# Altium PCB Strawberry Pi.PcbDoc
Units mm, origin at the board's own origin, x right, y up, seen from the top; angles counter-clockwise.
Board outline 85 x 55 mm, 2 copper layers (Top Layer, Bottom Layer); 91 components, 93 nets, 595 pads, 64 vias.
Unrouted connection lines stored in the file: 136.
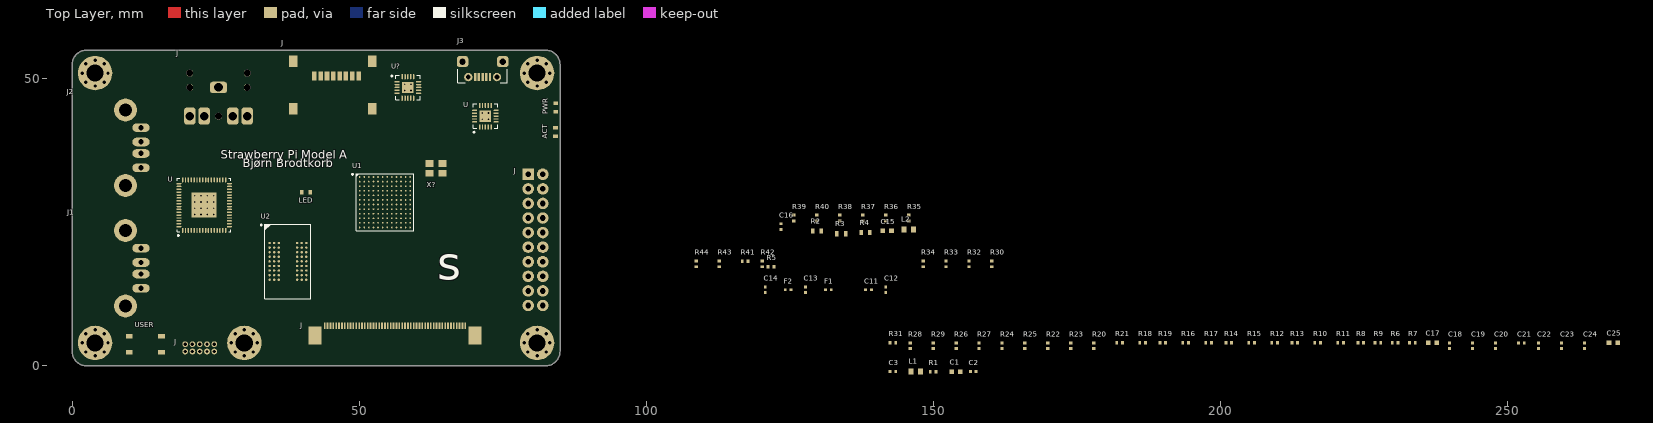
[diagram p0: Top Layer view]
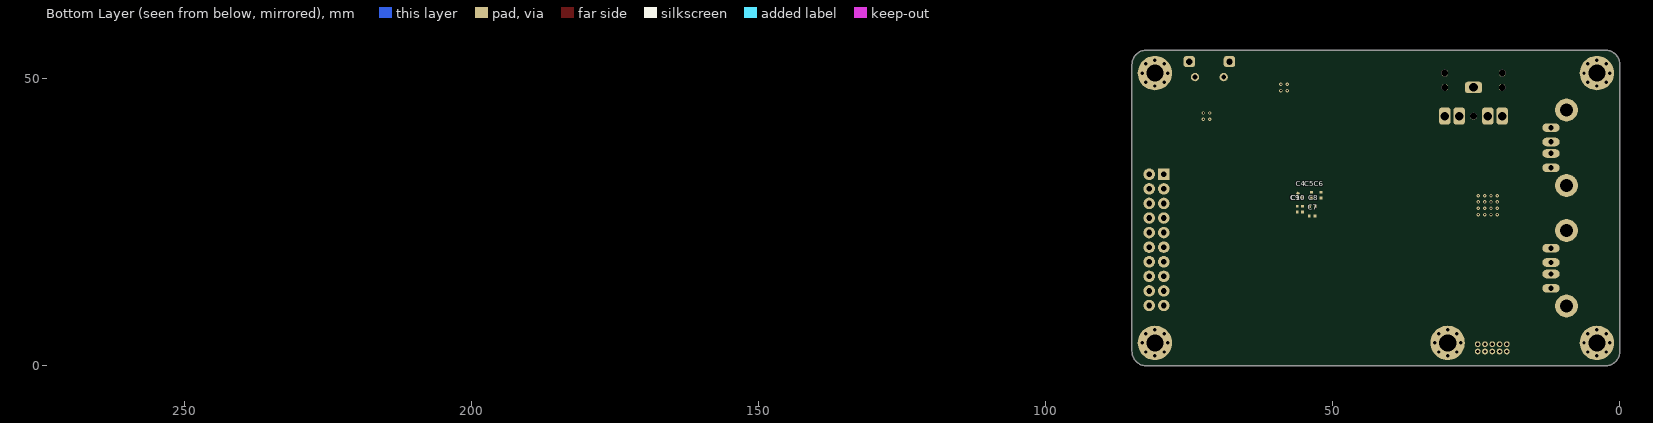
[diagram p1: Bottom Layer view, seen from below]

## Layer stack, top to bottom
Top Solder: solder mask 0.0102, Solder Resist, Dk 3.5
Top Layer: signal copper 0.0356
Dielectric 1: dielectric 0.32, FR-4, Dk 4.8
Bottom Layer: signal copper 0.0356
Bottom Solder: solder mask 0.0102, Solder Resist, Dk 3.5

## Board outline
85,2.54 cw(c82.46,2.54) 82.46,0 2.54,0 cw(c2.54,2.54) 0,2.54 0,52.46 cw(c2.54,52.46) 2.54,55 82.46,55 cw(c82.46,52.46) 85,52.46

## Design rules (kind name [scope] priority, off if disabled: settings)
Clearance [All] p1: gap=0.254 ignorepadtopadclearanceinfootprint=FALSE except(0: Arc-Hole Track-Hole SMDPad-Hole THPad-Hole Via-Hole Fill-Hole Poly-Hole Region-Hole Text-Hole)
PolygonConnect [All] p1: connectstyle=Relief reliefconductorwidth=0.254 reliefentries=4 polygonreliefangle="90 Angle" airgapwidth=0.254
RoutingVias [All] p1: holewidth=0.711 width=1.27 viastyle="Through Hole" minholewidth=0.711 minwidth=1.27 maxholewidth=0.711 maxwidth=1.27
SolderMaskExpansion [All] p1: expansion=0.102 istentingtop=FALSE
Width [All] p1: maxlimit=0.254 minlimit=0.254 preferedwidth=0.254
30 further rules are at their usual default settings.

## Classes and differential pairs
differential pair class DIFF90: USB_ROOT
component class "[09] - IO": ACT USER
component class "[04] - CPU IO": X?
component class "[07] - USB": U
component class "[12] - FTDI": U U?
net class DRAM_DATA: DRAM_D0 DRAM_D1 DRAM_D2 DRAM_D3 DRAM_D4 DRAM_D5 DRAM_D6 DRAM_D7 DRAM_D8 DRAM_D9 DRAM_D10 DRAM_D11 DRAM_D12 DRAM_D13 DRAM_D14 DRAM_D15
net class DRAM_ADDR: DRAM_A0 DRAM_A1 DRAM_A2 DRAM_A3 DRAM_A4 DRAM_A5 DRAM_A6 DRAM_A7 DRAM_A8 DRAM_A9 DRAM_A10 DRAM_A11 DRAM_A12
net class USB_ROOT: USB_ROOT_M USB_ROOT_P
component class "[11] - CONNECTORS": J J1 J2 J3
component class "[06] - MEMORY": C17 C18 C19 C20 C21 C22 C23 C24 C25 R6 R7 R8 R9 R10 R11 R12 R13 R14 R15 R16 R17 R18 R19 R20 R21 R22 R23 R24 R25 R26 R27 R28 R29 R30 R31 R32 R33 R34 R35 R36 R37 R38 R39 R40 R41 R42 R43 R44 U2
component class "[05] - CPU CRITICAL SIGNALS": C15 C16 L2 R2 R3 R4 R5
component class "[03] - CPU POWER": C1 C2 C3 C4 C5 C6 C7 C8 C9 C10 C11 C12 C13 C14 F1 F2 L1 R1 U1

## Components (designator, comment, footprint, x,y, rotation, side; value= is the part's Value field where it differs from the comment)
ACT "LED Green" "L0603 GREEN" 84.22,40.74 r90 top (schematic designator D)
C1 "02016D104KAT2A" C0603 154,-1 r0 top value=4.7uF
C2 "04023C103KAT2A" C0402 157,-1 r0 top value=100nF
C3 "04023C103KAT2A" C0402 143,-1 r0 top value=4.7uF
C4 "04023C103KAT2A" C0402 55.74,29.68 r225 bottom value=100nF
C5 "04023C103KAT2A" C0402 53.7,29.75 r270 bottom value=100nF
C6 "04023C103KAT2A" C0402 52.1,29.73 r270 bottom value=100nF
C7 "04023C103KAT2A" C0402 53.62,26.11 r180 bottom value=100nF
C8 "04023C103KAT2A" C0402 53.52,27.75 r180 bottom value=1uF
C9 "04023C103KAT2A" C0402 56.2,27.31 r270 bottom value=100nF
C10 "04023C103KAT2A" C0402 55.3,27.3 r90 bottom value=100nF
C11 "04023C103KAT2A" C0402 138.75,13.25 r0 top value=100nF
C12 "04023C103KAT2A" C0402 141.75,13.25 r90 top value=100nF
C13 "04023C103KAT2A" C0402 127.75,13.25 r90 top value=100nF
C14 "04023C103KAT2A" C0402 120.75,13.25 r90 top value=100nF
C15 "02016D104KAT2A" C0603 142,23.5 r0 top value=4.7uF
C16 "04023C103KAT2A" C0402 123.5,24.25 r90 top value=100nF
C17 "02016D104KAT2A" C0603 236.999,4 r0 top value=4.7uF
C18 "04023C103KAT2A" C0402 239.999,3.5 r90 top value=100nF
C19 "04023C103KAT2A" C0402 243.999,3.5 r90 top value=100nF
C20 "04023C103KAT2A" C0402 247.999,3.5 r90 top value=100nF
C21 "04023C103KAT2A" C0402 252.499,4 r0 top value=100nF
C22 "04023C103KAT2A" C0402 255.499,3.5 r90 top value=100nF
C23 "04023C103KAT2A" C0402 259.499,3.5 r90 top value=100nF
C24 "04023C103KAT2A" C0402 263.499,3.5 r90 top value=100nF
C25 "02016D104KAT2A" C0603 268.499,4 r0 top value=4.7uF
F1 "BLM15AG102SN1D" "Ferrite bead 0402" 131.75,13.25 r0 top value="470R @ 100MHz"
F2 "BLM15AG102SN1D" "Ferrite bead 0402" 124.75,13.25 r0 top value="470R @ 100MHz"
J "123-34-2234_11_1" "HEADER 2X5 MALE 1.27MM" 24.77,2.5 r90 top
J "123-34-2234_16" "HEADER 2X10 MALE" 79.46,10.51 r0 top
J "SD card" 47219-2001 49.9,50.5 r180 top
J "Audio Jack" "AUDIO JACK FLAT" 20.5,43.5 r270 top
J "FFC / FPC" 5-1734592-0 44,7 r0 top
J1 "USB A Receptacle" "USB A SOCKET" 12,20.5 r270 top
J2 "USB A Receptacle" "USB A SOCKET" 12,41.5 r270 top
J3 "USB micro" "USB MICRO" 71.5,52.5 r180 top
L1 "MLZ1608A2R2WT" "Inductor 0603" 147,-1 r0 top value=10mH
L2 "MLZ1608A2R2WT" "Inductor 0603" 145.75,23.75 r0 top value=10mH
LED "LED Blue" "L0603 BLUE" 40.75,30.25 r180 top (schematic designator D)
PWR "LED Red" "L0603 RED" 84.25,45 r270 top (schematic designator D)
R1 "CRCW04020000Z0ED" R0402 150,-1 r0 top value=1K
R2 "CPF-A-0603B100KE1" R0603 129.75,23.5 r0 top value=100K
R3 "CPF-A-0603B100KE1" R0603 134,23 r0 top value=100K
R4 "CPF-A-0603B100KE1" R0603 138.25,23.25 r0 top value=100K
R5 "CRCW04020000Z0ED" R0402 121.75,17.25 r0 top value=1K
R6 "CRCW04020000Z0ED" R0402 230.499,4 r0 top value=1K
R7 "CRCW04020000Z0ED" R0402 233.499,4 r0 top value=1K
R8 "CRCW04020000Z0ED" R0402 224.499,4 r0 top value=1K
R9 "CRCW04020000Z0ED" R0402 227.499,4 r0 top value=1K
R10 "CRCW04020000Z0ED" R0402 216.999,4 r0 top value=1K
R11 "CRCW04020000Z0ED" R0402 220.999,4 r0 top value=1K
R12 "CRCW04020000Z0ED" R0402 209.499,4 r0 top value=1K
R13 "CRCW04020000Z0ED" R0402 212.999,4 r0 top value=1K
R14 "CRCW04020000Z0ED" R0402 201.499,4 r0 top value=1K
R15 "CRCW04020000Z0ED" R0402 205.499,4 r0 top value=1K
R16 "CRCW04020000Z0ED" R0402 193.999,4 r0 top value=1K
R17 "CRCW04020000Z0ED" R0402 197.999,4 r0 top value=1K
R18 "CRCW04020000Z0ED" R0402 186.499,4 r0 top value=1K
R19 "CRCW04020000Z0ED" R0402 189.999,4 r0 top value=1K
R20 "CRCW04020000Z0ED" R0402 177.999,3.5 r90 top value=1K
R21 "CRCW04020000Z0ED" R0402 182.499,4 r0 top value=1K
R22 "CRCW04020000Z0ED" R0402 169.999,3.5 r90 top value=1K
R23 "CRCW04020000Z0ED" R0402 173.999,3.5 r90 top value=1K
R24 "CRCW04020000Z0ED" R0402 161.999,3.5 r90 top value=1K
R25 "CRCW04020000Z0ED" R0402 165.999,3.5 r90 top value=1K
R26 "CRCW04020000Z0ED" R0402 153.999,3.5 r90 top value=1K
R27 "CRCW04020000Z0ED" R0402 157.999,3.5 r90 top value=1K
R28 "CRCW04020000Z0ED" R0402 146,3.5 r90 top value=1K
R29 "CRCW04020000Z0ED" R0402 149.999,3.5 r90 top value=1K
R30 "CRCW04020000Z0ED" R0402 160.25,17.75 r90 top value=1K
R31 "CRCW04020000Z0ED" R0402 143,4 r0 top value=1K
R32 "CRCW04020000Z0ED" R0402 156.25,17.75 r90 top value=1K
R33 "CRCW04020000Z0ED" R0402 152.25,17.75 r90 top value=1K
R34 "CRCW04020000Z0ED" R0402 148.25,17.75 r90 top value=1K
R35 "CRCW04020000Z0ED" R0402 145.75,25.75 r90 top value=1K
R36 "CRCW04020000Z0ED" R0402 141.75,25.75 r90 top value=1K
R37 "CRCW04020000Z0ED" R0402 137.75,25.75 r90 top value=1K
R38 "CRCW04020000Z0ED" R0402 133.75,25.75 r90 top value=1K
R39 "CRCW04020000Z0ED" R0402 125.75,25.75 r90 top value=1K
R40 "CRCW04020000Z0ED" R0402 129.75,25.75 r90 top value=1K
R41 "CRCW04020000Z0ED" R0402 117.25,18.25 r0 top value=1K
R42 "CRCW04020000Z0ED" R0402 120.25,17.75 r90 top value=1K
R43 "CRCW04020000Z0ED" R0402 112.75,17.75 r90 top value=1K
R44 "CRCW04020000Z0ED" R0402 108.75,17.75 r90 top value=1K
U "FTDI" FT2232HQ 23,28 r90 top
U "FTDI" FT231XQ-R 72,43.5 r90 top
U1 "Cortex-M7 @ 300MHz" "ATSAME70Q21B LBGA" 54.5,28.5 r0 top
U2 "DRAM" IS42S16320D-7BL 37.6,18.2 r0 top
U? "FTDI" FT231XQ-R 58.5,48.5 r0 top
USER "Pushbutton" "KSC222G LFS" 12.75,3.75 r90 top (schematic designator SW)
X? "12MHz" MCSJK-7U-12.00-12-30-80-B-30 62.3,33.55 r0 top

## Footprints (in the part's own frame and the unit in brackets; to place one, negate y for a bottom-side part, rotate by r counter-clockwise, add the part's x,y. Pads: shape width x height; smd on the part's side, far side on the other; paste and mask are expansions set on the pad)
5-1734592-0 [mm] "FFC / FPC"
  rect 0.3x1.1 smd: 1(0,0) 2(0.5,0) 3(1,0) 4(1.5,0) 5(2,0) 6(2.5,0) 7(3,0) 8(3.5,0) 9(4,0) 10(4.5,0) 11(5,0) 12(5.5,0) 13(6,0) 14(6.5,0) 15(7,0) 16(7.5,0) 17(8,0) 18(8.5,0) 19(9,0) 20(9.5,0) 21(10,0) 22(10.5,0) 23(11,0) 24(11.5,0) 25(12,0) 26(12.5,0) 27(13,0) 28(13.5,0) 29(14,0) 30(14.5,0) 31(15,0) 32(15.5,0) 33(16,0) 34(16.5,0) 35(17,0) 36(17.5,0) 37(18,0) 38(18.5,0) 39(19,0) 40(19.5,0) 41(20,0) 42(20.5,0) 43(21,0) 44(21.5,0) 45(22,0) 46(22.5,0) 47(23,0) 48(23.5,0) 49(24,0) 50(24.5,0)
  rect 2.3x3.1 smd: 51(-1.67,-1.7) 51(26.17,-1.7)
  body extent -3.01,-6.77 27.49,0.38, height 2.04
47219-2001 [mm]
  rect 0.8x1.5 smd: 1(7.7,0) 2(6.6,0) 3(5.5,0) 4(4.4,0) 5(3.3,0) 6(2.2,0) 7(1.1,0) 8(0,0)
  rect 1.45x2 smd: ""(-2.38,5.7) ""(-2.38,-2.6) ""(11.37,-2.6) ""(11.37,5.7)
  body extent -2.75,-6.4 11.75,9.5, height 1.77
"ATSAME70Q21B LBGA" [mm] "BGA, 144-Leads, Body 10.00x10.00mmx1.60mm, Pitch 0.80mm"
  round 0.29 smd: A1(-4.4,4.4) A2(-3.6,4.4) A3(-2.8,4.4) A4(-2,4.4) A5(-1.2,4.4) A6(-0.4,4.4) A7(0.4,4.4) A8(1.2,4.4) A9(2,4.4) A10(2.8,4.4) A11(3.6,4.4) A12(4.4,4.4) B1(-4.4,3.6) B2(-3.6,3.6) B3(-2.8,3.6) B4(-2,3.6) B5(-1.2,3.6) B6(-0.4,3.6) B7(0.4,3.6) B8(1.2,3.6) B9(2,3.6) B10(2.8,3.6) B11(3.6,3.6) B12(4.4,3.6) C1(-4.4,2.8) C2(-3.6,2.8) C3(-2.8,2.8) C4(-2,2.8) C5(-1.2,2.8) C6(-0.4,2.8) C7(0.4,2.8) C8(1.2,2.8) C9(2,2.8) C10(2.8,2.8) C11(3.6,2.8) C12(4.4,2.8) D1(-4.4,2) D2(-3.6,2) D3(-2.8,2) D4(-2,2) D5(-1.2,2) D6(-0.4,2) D7(0.4,2) D8(1.2,2) D9(2,2) D10(2.8,2) D11(3.6,2) D12(4.4,2) E1(-4.4,1.2) E2(-3.6,1.2) E3(-2.8,1.2) E4(-2,1.2) E5(-1.2,1.2) E6(-0.4,1.2) E7(0.4,1.2) E8(1.2,1.2) E9(2,1.2) E10(2.8,1.2) E11(3.6,1.2) E12(4.4,1.2) F1(-4.4,0.4) F2(-3.6,0.4) F3(-2.8,0.4) F4(-2,0.4) F5(-1.2,0.4) F6(-0.4,0.4) F7(0.4,0.4) F8(1.2,0.4) F9(2,0.4) F10(2.8,0.4) F11(3.6,0.4) F12(4.4,0.4) G1(-4.4,-0.4) G2(-3.6,-0.4) G3(-2.8,-0.4) G4(-2,-0.4) G5(-1.2,-0.4) G6(-0.4,-0.4) G7(0.4,-0.4) G8(1.2,-0.4) G9(2,-0.4) G10(2.8,-0.4) G11(3.6,-0.4) G12(4.4,-0.4) H1(-4.4,-1.2) H2(-3.6,-1.2) H3(-2.8,-1.2) H4(-2,-1.2) H5(-1.2,-1.2) H6(-0.4,-1.2) H7(0.4,-1.2) H8(1.2,-1.2) H9(2,-1.2) H10(2.8,-1.2) H11(3.6,-1.2) H12(4.4,-1.2) J1(-4.4,-2) J2(-3.6,-2) J3(-2.8,-2) J4(-2,-2) J5(-1.2,-2) J6(-0.4,-2) J7(0.4,-2) J8(1.2,-2) J9(2,-2) J10(2.8,-2) J11(3.6,-2) J12(4.4,-2) K1(-4.4,-2.8) K2(-3.6,-2.8) K3(-2.8,-2.8) K4(-2,-2.8) K5(-1.2,-2.8) K6(-0.4,-2.8) K7(0.4,-2.8) K8(1.2,-2.8) K9(2,-2.8) K10(2.8,-2.8) K11(3.6,-2.8) K12(4.4,-2.8) L1(-4.4,-3.6) L2(-3.6,-3.6) L3(-2.8,-3.6) L4(-2,-3.6) L5(-1.2,-3.6) L6(-0.4,-3.6) L7(0.4,-3.6) L8(1.2,-3.6) L9(2,-3.6) L10(2.8,-3.6) L11(3.6,-3.6) L12(4.4,-3.6) M1(-4.4,-4.4) M2(-3.6,-4.4) M3(-2.8,-4.4) M4(-2,-4.4) M5(-1.2,-4.4) M6(-0.4,-4.4) M7(0.4,-4.4) M8(1.2,-4.4) M9(2,-4.4) M10(2.8,-4.4) M11(3.6,-4.4) M12(4.4,-4.4)
  silkscreen extent -5.77,-5 5,5, body extent -5,-5 5,5, height 1.6
"AUDIO JACK FLAT" [mm]
  rrect50% 2x3 hole 1.5: 1(-5,5)
  rrect50% 3x2 hole 1.5: 2(0,0) 3(0,2.5) 4(0,7.5) 5(0,10)
  round 1.2 hole 1.2: ""(-7.5,10) ""(-7.5,0) ""(-5,10) ""(-5,0) ""(0,5)
  body extent -11.57,-0.95 2.47,11.05, height 5.6
C0402 [mm]
  rect 0.5x0.5 smd: 1(-0.5,0) 2(0.5,0)
  body extent -0.5,-0.25 0.5,0.25, height 0.5
C0603 [mm]
  rect 0.8x0.8 smd: 1(-0.75,0) 2(0.75,0)
  body extent -0.8,-0.4 0.8,0.4, height 0.8
"Ferrite bead 0402" [mm]
  rect 0.5x0.5 smd: 1(-0.5,0) 2(0.5,0)
  body extent -0.5,-0.25 0.5,0.25, height 0.5
FT231XQ-R [mm] "QFN, 20-Leads, Body 4.00x4.00mm, Pitch 0.50mm, Thermal Pad 1.98x1.98mm, IPC Medium Density"
  oval 0.9x0.25 smd: 1(-1.875,1) 2(-1.875,0.5) 3(-1.875,0) 4(-1.875,-0.5) 5(-1.875,-1) 11(1.875,-1) 12(1.875,-0.5) 13(1.875,0) 14(1.875,0.5) 15(1.875,1)
  oval 0.25x0.9 smd: 6(-1,-1.875) 7(-0.5,-1.875) 8(0,-1.875) 9(0.5,-1.875) 10(1,-1.875) 16(1,1.875) 17(0.5,1.875) 18(0,1.875) 19(-0.5,1.875) 20(-1,1.875)
  rect 1.98x1.98 smd: 21(0,0)
  silkscreen extent -2.92,-2.15 2.15,2.15, body extent -2,-2 2,2, height 0.8
FT2232HQ [mm] "QFN, 64-Leads, Body 9.00x9.00mm, Pitch 0.50mm, Thermal Pad 4.35x4.35mm, IPC Medium Density"
  oval 0.85x0.25 smd: 1(-4.4,3.75) 2(-4.4,3.25) 3(-4.4,2.75) 4(-4.4,2.25) 5(-4.4,1.75) 6(-4.4,1.25) 7(-4.4,0.75) 8(-4.4,0.25) 9(-4.4,-0.25) 10(-4.4,-0.75) 11(-4.4,-1.25) 12(-4.4,-1.75) 13(-4.4,-2.25) 14(-4.4,-2.75) 15(-4.4,-3.25) 16(-4.4,-3.75) 33(4.4,-3.75) 34(4.4,-3.25) 35(4.4,-2.75) 36(4.4,-2.25) 37(4.4,-1.75) 38(4.4,-1.25) 39(4.4,-0.75) 40(4.4,-0.25) 41(4.4,0.25) 42(4.4,0.75) 43(4.4,1.25) 44(4.4,1.75) 45(4.4,2.25) 46(4.4,2.75) 47(4.4,3.25) 48(4.4,3.75)
  oval 0.25x0.85 smd: 17(-3.75,-4.4) 18(-3.25,-4.4) 19(-2.75,-4.4) 20(-2.25,-4.4) 21(-1.75,-4.4) 22(-1.25,-4.4) 23(-0.75,-4.4) 24(-0.25,-4.4) 25(0.25,-4.4) 26(0.75,-4.4) 27(1.25,-4.4) 28(1.75,-4.4) 29(2.25,-4.4) 30(2.75,-4.4) 31(3.25,-4.4) 32(3.75,-4.4) 49(3.75,4.4) 50(3.25,4.4) 51(2.75,4.4) 52(2.25,4.4) 53(1.75,4.4) 54(1.25,4.4) 55(0.75,4.4) 56(0.25,4.4) 57(-0.25,4.4) 58(-0.75,4.4) 59(-1.25,4.4) 60(-1.75,4.4) 61(-2.25,4.4) 62(-2.75,4.4) 63(-3.25,4.4) 64(-3.75,4.4)
  rect 4.35x4.35 smd: 65(0,0)
  silkscreen extent -5.42,-4.65 4.65,4.65, body extent -4.5,-4.5 4.5,4.5, height 0.9
"HEADER 2X5 MALE 1.27MM" [mm]
  round 1 hole 0.6: 1(0,5.08) 2(1.27,5.08) 3(0,3.81) 4(1.27,3.81) 5(0,2.54) 6(1.27,2.54) 7(0,1.27) 8(1.27,1.27) 9(0,0) 10(1.27,0)
  body extent -1.05,-0.64 2.35,5.72, height 5.5
"HEADER 2X10 MALE" [mm]
  rect 2x2 hole 1: 1(0,22.86)
  round 2 hole 1: 2(2.54,22.86) 3(0,20.32) 4(2.54,20.32) 5(0,17.78) 6(2.54,17.78) 7(0,15.24) 8(2.54,15.24) 9(0,12.7) 10(2.54,12.7) 11(0,10.16) 12(2.54,10.16) 13(0,7.62) 14(2.54,7.62) 15(0,5.08) 16(2.54,5.08) 17(0,2.54) 18(2.54,2.54) 19(0,0) 20(2.54,0)
  body extent -1.27,-1.27 3.81,24.13, height 8.89
"Inductor 0603" [mm]
  rect 0.88x0.99 smd: 1(-0.815,0) 2(0.815,0)
  body extent -0.87,-0.48 0.87,0.48, height 0.91
IS42S16320D-7BL [mm] "BGA, 54-Leads, Body 8.00x13.00mmx1.20mm, Pitch 0.80mm"
  round 0.41 smd: A1(-3.2,3.2) A2(-2.4,3.2) A3(-1.6,3.2) A7(1.6,3.2) A8(2.4,3.2) A9(3.2,3.2) B1(-3.2,2.4) B2(-2.4,2.4) B3(-1.6,2.4) B7(1.6,2.4) B8(2.4,2.4) B9(3.2,2.4) C1(-3.2,1.6) C2(-2.4,1.6) C3(-1.6,1.6) C7(1.6,1.6) C8(2.4,1.6) C9(3.2,1.6) D1(-3.2,0.8) D2(-2.4,0.8) D3(-1.6,0.8) D7(1.6,0.8) D8(2.4,0.8) D9(3.2,0.8) E1(-3.2,0) E2(-2.4,0) E3(-1.6,0) E7(1.6,0) E8(2.4,0) E9(3.2,0) F1(-3.2,-0.8) F2(-2.4,-0.8) F3(-1.6,-0.8) F7(1.6,-0.8) F8(2.4,-0.8) F9(3.2,-0.8) G1(-3.2,-1.6) G2(-2.4,-1.6) G3(-1.6,-1.6) G7(1.6,-1.6) G8(2.4,-1.6) G9(3.2,-1.6) H1(-3.2,-2.4) H2(-2.4,-2.4) H3(-1.6,-2.4) H7(1.6,-2.4) H8(2.4,-2.4) H9(3.2,-2.4) J1(-3.2,-3.2) J2(-2.4,-3.2) J3(-1.6,-3.2) J7(1.6,-3.2) J8(2.4,-3.2) J9(3.2,-3.2)
  silkscreen extent -4.77,-6.5 4,6.5, body extent -4,-6.5 4,6.5, height 1.2
"KSC222G LFS" [mm]
  rect 0.8x1.2 smd: 1(-1.4,2.794) 2(-1.4,-2.794) 3(1.4,2.794) 4(1.4,-2.794)
  body extent -2.29,-3.06 2.29,3.05, height 1.5
"L0603 BLUE" [mm]
  rect 0.6x0.8 smd: 1(-0.725,0) 2(0.725,0)
  body extent -0.8,-0.4 0.8,0.4, height 0.6
"L0603 GREEN" [mm]
  rect 0.6x0.8 smd: 1(-0.725,0) 2(0.725,0)
  body extent -0.8,-0.4 0.8,0.4, height 0.6
"L0603 RED" [mm]
  rect 0.6x0.8 smd: 1(-0.725,0) 2(0.725,0)
  body extent -0.8,-0.4 0.8,0.4, height 0.6
MCSJK-7U-12.00-12-30-80-B-30 [mm]
  rect 1.4x1.2 smd: 1(0,0) 2(2.2,0) 3(2.2,1.7) 4(0,1.7)
  body extent -0.5,-0.4 2.7,2.1, height 1.2
R0402 [mm]
  rect 0.5x0.6 smd: 1(-0.5,0) 2(0.5,0)
  body extent -0.5,-0.25 0.5,0.25, height 0.35
R0603 [mm]
  rect 0.6x0.9 smd: 1(-0.75,0) 2(0.75,0)
  body extent -0.8,-0.45 0.8,0.45, height 0.5
"USB A SOCKET" [mm]
  oval 1.5x3 hole 0.95: 1(0,0) 2(2.5,0) 3(4.5,0) 4(7,0)
  round 4 hole 2.3: ""(-3.07,-2.7) ""(10.07,-2.7)
  body extent -3.75,-13.05 10.75,0.95, height 7.64
"USB MICRO" [mm]
  rrect50% 2x1.9 hole 1.1: 0(-3.517,-0.5) 0(3.483,-0.5)
  round 1.45 hole 0.85: 0(-2.517,2.2) 0(2.483,2.2)
  rect 0.4x1.35 smd: 1(-1.317,2.2) 2(-0.667,2.2) 3(-0.017,2.2) 4(0.633,2.2) 5(1.283,2.2)
  silkscreen extent -4.32,0.85 4.32,3.18, body extent -4.1,-3.03 4.1,2.4, height 0.23

## Part data
ACT: library part HSMG-C196, "LED 0603 Green"
C1 C15 C17 C25: "C0603"
C2 C3 C4 C5 C6 C7 C8 C9 C10 C11 C12 C13 C14 C16 C18 C19 C20 C21 C22 C23 C24: "C0402"
F1 F2: "Ferrite bead 0402"
J: "Header 2x5 male 1.27mm"
J: "Header 2x10 male 2.54mm"
J: library part 47219-2001, "SD micro card", Supplier Part Number 1=2614940, Supplier 1=Farnell
J: library part FC68133, "Audio jack flat 5 contacts", Supplier Part Number 1=2518190, Supplier 1=Farnell
J: library part 5-1734592-0, "FFC / FPC 50 pins 0.5mm pitch", Supplier Part Number 1=2528036, Supplier 1=Farnell
J1 J2: library part MC32593, "USB A", Supplier Part Number 1=1696534, Supplier 1=Farnell
J3: library part 47590-0001, "USB B micro", Supplier Part Number 1=1568022, Supplier 1=Farnell
L1 L2: "Inductor 0603"
LED: library part HSMG-C199, "LED 0603 Blue"
PWR: library part HSMG-C190, "LED 0603 Red"
R1 R5 R6 R7 R8 R9 R10 R11 R12 R13 R14 R15 R16 R17 R18 R19 R20 R21 R22 R23 R24 R25 R26 R27 R28 R29 R30 R31 R32 R33 R34 R35 R36 R37 R38 R39 R40 R41 R42 R43 R44: "R0402"
R2 R3 R4: "R0603"
U: library part FT2232HQ, "USB to multipurpose UART / FIFO", Supplier Part Number 1=768-1346-ND, Supplier 1=Digi-Key
U U?: library part FT231XQ-R, "USB to RS-232 converter", Supplier Part Number 1=2081330, Supplier 1=Farnell
U1: library part ATSAMS70Q21BLBGA, "ATSAMS70Q21B LBGA", Supplier Part Number 1=2484397, Supplier 1=Farnell
U2: library part IS42S16320D-7BL, "SDRAM 512Mb 32Mx16", Supplier Part Number 1=706-1206-ND, Supplier 1=Digi-Key
USER: library part "KSC222G LFS", "Pushbutton SMD", Supplier Part Number 1=2845714, Supplier 1=Farnell
X?: library part MCSJK-7U-12.00-12-30-80-B-30, "Crystal 12MHz 3.2mm x 2.5mm", Supplier Part Number 1=2853917, Supplier 1=Farnell

## Free pads (board coordinates)
  round 6 hole 3: ""(4,4) ""(4,51) ""(30,4) ""(81,4) ""(81,51)

## Via types
v1: diameter 0.6, hole 0.6, Top Layer to Bottom Layer, 40 vias
v2: diameter 0.6, hole 0.3, Top Layer to Bottom Layer, 24 vias

## Nets (pads, with @x,y where several pads share a name; then routed paths per layer and width w, separated by ;. In a path a pad name is that pad's centre, name@x,y a point inside that pad or via, vN(x,y) a via of type N, cw(c..) or ccw(c..) an arc to the next point about the centre after c; other vN are vias at no path point)
+3V3: C17.2 C18.2 C19.2 C20.2 C21.2 C22.2 C23.2 C24.2 C25.2 U2.A7 U2.A9 U2.B3 U2.C7 U2.D3 U2.E7 U2.J9
CPU_3V3: C1.1 C2.2 C4.2 C5.2 C6.2 C7.2 L2.1 R1.1 R2.2 R3.2 R4.2 U1.C1 U1.E7 U1.G8 U1.H6 U1.H7
DRAM_A0: R6.2
DRAM_A1: R8.2
DRAM_A2: R10.2
DRAM_A3: R12.2
DRAM_A4: R14.2
DRAM_A5: R16.2
DRAM_A6: R18.2
DRAM_A7: R20.2
DRAM_A8: R22.2
DRAM_A9: R24.2
DRAM_A10: R26.2
DRAM_A11: R28.2
DRAM_A12: R30.2
DRAM_D0: R7.1
DRAM_D1: R9.1
DRAM_D2: R11.1
DRAM_D3: R13.1
DRAM_D4: R15.1
DRAM_D5: R17.1
DRAM_D6: R19.1
DRAM_D7: R21.1
DRAM_D8: R23.1
DRAM_D9: R25.1
DRAM_D10: R27.1
DRAM_D11: R29.1
DRAM_D12: R31.1
DRAM_D13: R32.1
DRAM_D14: R33.1
DRAM_D15: R35.1
GND: C1.2 C2.1 C3.1 C4.1 C5.1 C6.1 C7.1 C8.1 C9.1 C10.1 C11.1 C12.1 C13.1 C14.1 C15.2 C16.1 C17.1 C18.1 C19.1 C20.1 C21.1 C22.1 C23.1 C24.1 C25.1 U1.B11 U1.D2 U1.D5 U1.E5 U1.E6 U1.F5 U1.F6 U1.F7 U1.G4 U1.G5 U1.G6 U1.G7 U1.H11 U2.A1 U2.A3 U2.B7 U2.C3 U2.D7 U2.E3 U2.J1
NetC3_2: C3.2 L1.2 U1.F8
NetC8_2: C8.2 C9.2 C10.2 C11.2 C12.2 F1.1 F2.1 U1.C3 U1.E8 U1.H5 U1.H8
NetC13_2: C13.2 F1.2 U1.J7
NetC14_2: C14.2 F2.2 U1.B3
NetC15_1: C15.1 L2.2 U1.D1
NetC16_2: C16.2 R5.1 U1.C4
NetR2_1: R2.1 U1.H12
NetR3_1: R3.1 U1.J11
NetR4_1: R4.1 U1.F9
NetR6_1: R6.1 U2.H7
NetR7_2: R7.2 U2.A8
NetR8_1: R8.1 U2.H8
NetR9_2: R9.2 U2.B9
NetR10_1: R10.1 U2.J8
NetR11_2: R11.2 U2.B8
NetR12_1: R12.1 U2.J7
NetR13_2: R13.2 U2.C9
NetR14_1: R14.1 U2.J3
NetR15_2: R15.2 U2.C8
NetR16_1: R16.1 U2.J2
NetR17_2: R17.2 U2.D9
NetR18_1: R18.1 U2.H3
NetR19_2: R19.2 U2.D8
NetR20_1: R20.1 U2.H2
NetR21_2: R21.2 U2.E9
NetR22_1: R22.1 U2.H1
NetR23_2: R23.2 U2.E1
NetR24_1: R24.1 U2.G3
NetR25_2: R25.2 U2.D2
NetR26_1: R26.1 U2.H9
NetR27_2: R27.2 U2.D1
NetR28_1: R28.1 U2.G2
NetR29_2: R29.2 U2.C2
NetR30_1: R30.1 U2.G1
NetR31_2: R31.2 U2.C1
NetR32_2: R32.2 U2.B2
NetR33_2: R33.2 U2.B1
NetR34_1: R34.1 U2.G9
NetR34_2: R34.2
NetR35_2: R35.2 U2.A2
NetR36_1: R36.1 U2.F8
NetR36_2: R36.2
NetR37_1: R37.1 U2.F7
NetR37_2: R37.2
NetR38_1: R38.1 U2.F9
NetR38_2: R38.2
NetR39_1: R39.1 U2.F2
NetR39_2: R39.2
NetR40_1: R40.1
NetR40_2: R40.2 U2.F1
NetR41_1: R41.1 U2.F3
NetR41_2: R41.2
NetR42_1: R42.1
NetR42_2: R42.2 U2.E8
NetR43_1: R43.1 U2.G7
NetR43_2: R43.2
NetR44_1: R44.1 U2.G8
NetR44_2: R44.2
NetU1_C10: U1.C10
USB_ROOT_M: U1.B4
USB_ROOT_P: U1.A4
pads on no net: ACT.1 ACT.2 J1. J1.1 J1.2 J1.3 J1.4 J2. J2.1 J2.2 J2.3 J2.4 J3.0 J3.1 J3.2 J3.3 J3.4 J3.5 J. J.1 J.2 J.3 J.4 J.5 J.6 J.7 J.8 J.9 J.10 J.11 J.12 J.13 J.14 J.15 J.16 J.17 J.18 J.19 J.20 J.21 J.22 J.23 J.24 J.25 J.26 J.27 J.28 J.29 J.30 J.31 J.32 J.33 J.34 J.35 J.36 J.37 J.38 J.39 J.40 J.41 J.42 J.43 J.44 J.45 J.46 J.47 J.48 J.49 J.50 J.51 L1.1 LED.1 LED.2 PWR.1 PWR.2 R1.2 R5.2 U1.A1 U1.A2 U1.A3 U1.A5 U1.A6 U1.A7 U1.A8 U1.A9 U1.A10 U1.A11 U1.A12 U1.B1 U1.B2 U1.B5 U1.B6 U1.B7 U1.B8 U1.B9 U1.B10 U1.B12 U1.C2 U1.C5 U1.C6 U1.C7 U1.C8 U1.C9 U1.C11 U1.C12 U1.D3 U1.D4 U1.D6 U1.D7 U1.D8 U1.D9 U1.D10 U1.D11 U1.D12 U1.E1 U1.E2 U1.E3 U1.E4 U1.E9 U1.E10 U1.E11 U1.E12 U1.F1 U1.F2 U1.F3 U1.F4 U1.F10 U1.F11 U1.F12 U1.G1 U1.G2 U1.G3 U1.G9 U1.G10 U1.G11 U1.G12 U1.H1 U1.H2 U1.H3 U1.H4 U1.H9 U1.H10 U1.J1 U1.J2 U1.J3 U1.J4 U1.J5 U1.J6 U1.J8 U1.J9 U1.J10 U1.J12 U1.K1 U1.K2 U1.K3 U1.K4 U1.K5 U1.K6 U1.K7 U1.K8 U1.K9 U1.K10 U1.K11 U1.K12 U1.L1 U1.L2 U1.L3 U1.L4 U1.L5 U1.L6 U1.L7 U1.L8 U1.L9 U1.L10 U1.L11 U1.L12 U1.M1 U1.M2 U1.M3 U1.M4 U1.M5 U1.M6 U1.M7 U1.M8 U1.M9 U1.M10 U1.M11 U1.M12 U2.E2 U.1 U.2 U.3 U.4 U.5 U.6 U.7 U.8 U.9 U.10 U.11 U.12 U.13 U.14 U.15 U.16 U.17 U.18 U.19 U.20 U.21 U.22 U.23 U.24 U.25 U.26 U.27 U.28 U.29 U.30 U.31 U.32 U.33 U.34 U.35 U.36 U.37 U.38 U.39 U.40 U.41 U.42 U.43 U.44 U.45 U.46 U.47 U.48 U.49 U.50 U.51 U.52 U.53 U.54 U.55 U.56 U.57 U.58 U.59 U.60 U.61 U.62 U.63 U.64 U.65 U?.1 U?.2 U?.3 U?.4 U?.5 U?.6 U?.7 U?.8 U?.9 U?.10 U?.11 U?.12 U?.13 U?.14 U?.15 U?.16 U?.17 U?.18 U?.19 U?.20 U?.21 USER.1 USER.2 USER.3 USER.4 X?.1 X?.2 X?.3 X?.4
copper on no net:
  other v1: 4,1.75 30,1.75 81,1.75 2.409,2.409 5.591,2.409 28.409,2.409 31.591,2.409 79.409,2.409 82.591,2.409 1.75,4 6.25,4 27.75,4 32.25,4 78.75,4 83.25,4 2.409,5.591 5.591,5.591 28.409,5.591 31.591,5.591 79.409,5.591 82.591,5.591 4,6.25 30,6.25 81,6.25 4,48.75 81,48.75 2.409,49.409 5.591,49.409 79.409,49.409 82.591,49.409 1.75,51 6.25,51 78.75,51 83.25,51 2.409,52.591 5.591,52.591 79.409,52.591 82.591,52.591 4,53.25 81,53.25
  other v2: 21.35,26.35 22.45,26.35 23.55,26.35 24.65,26.35 21.35,27.45 22.45,27.45 23.55,27.45 24.65,27.45 21.35,28.55 22.45,28.55 23.55,28.55 24.65,28.55 21.35,29.65 22.45,29.65 23.55,29.65 24.65,29.65 71.45,42.95 72.55,42.95 71.45,44.05 72.55,44.05 57.95,47.95 59.05,47.95 57.95,49.05 59.05,49.05

## Silkscreen, mask and mechanical layers (free items; w line width, h text height)
Top Overlay:
  text "Strawberry Pi Model A" at 25.87,35.537 h2.5
  text "Bjørn Brodtkorb" at 29.76,34.047 h2.5
  text "s" at 63.641,13.038 h10